# Altium PCB PCB1.PcbDoc
Units mil, origin at the board's own origin, x right, y up, seen from the top; angles counter-clockwise.
Board outline 1140 x 500 mil, 2 copper layers (Top Layer, Bottom Layer); 14 components, 8 nets, 37 pads, 4 vias.
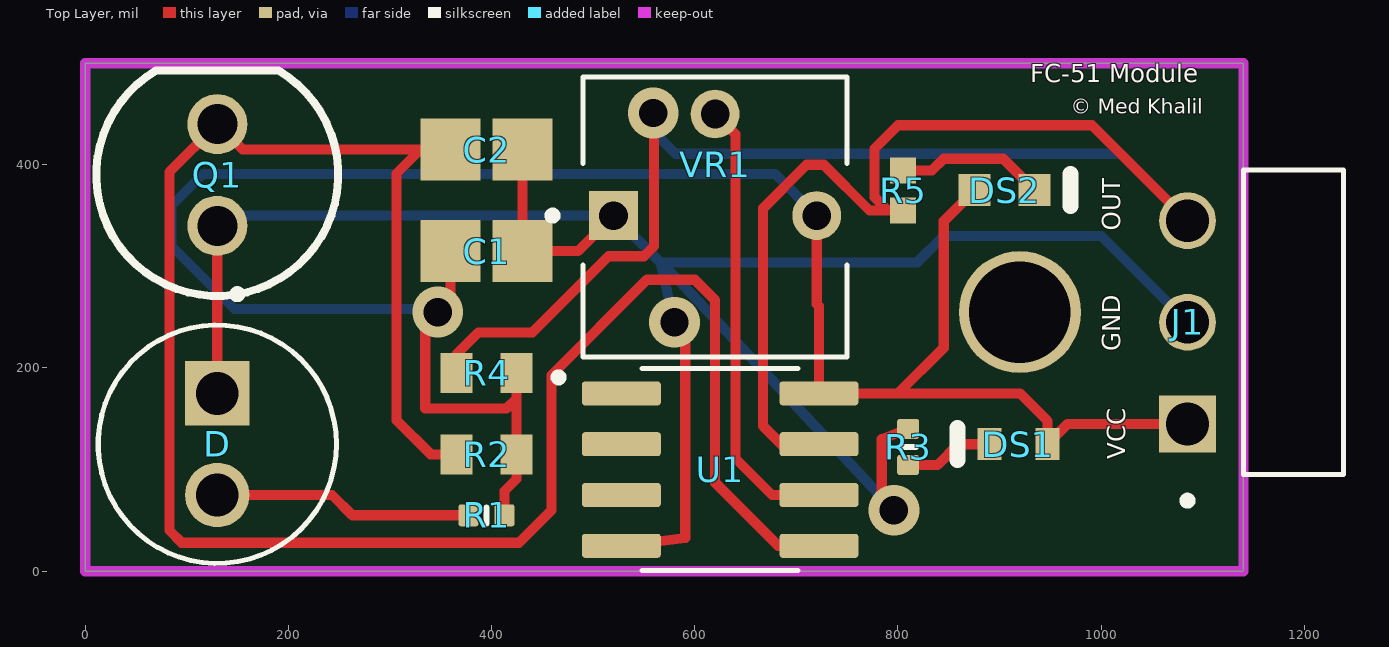
[diagram p0: Top Layer view]
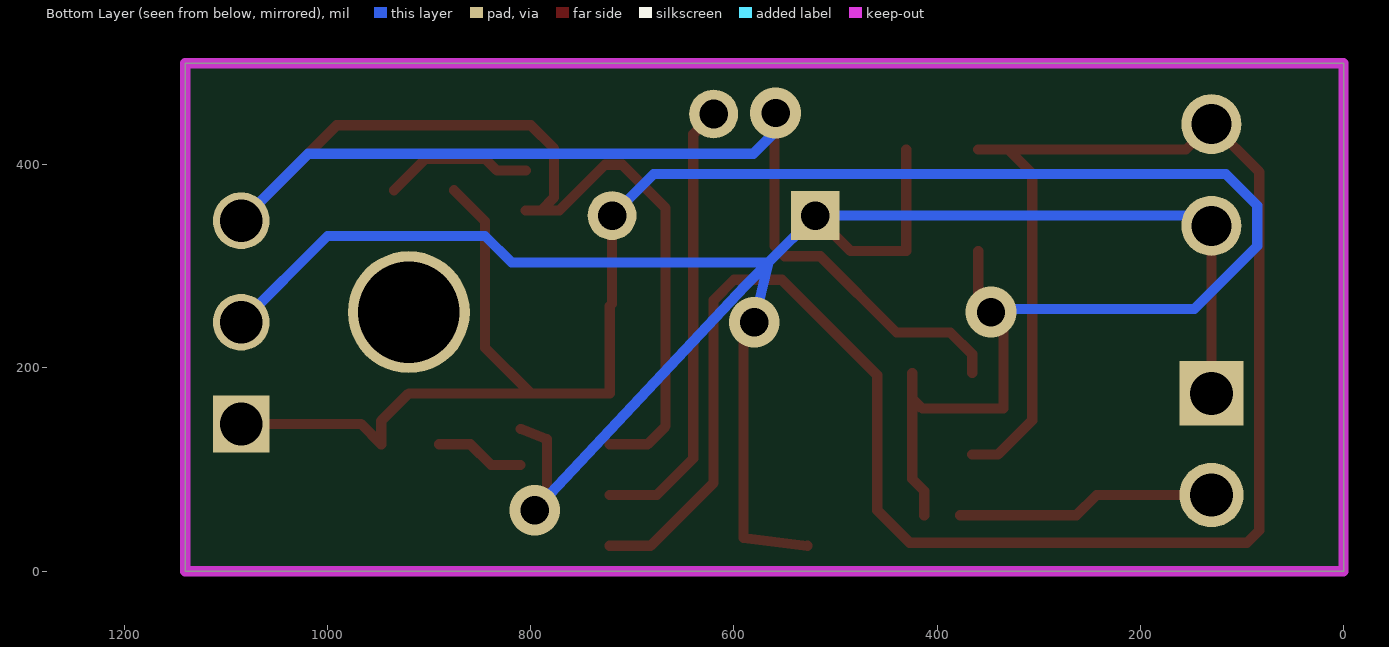
[diagram p1: Bottom Layer view, seen from below]
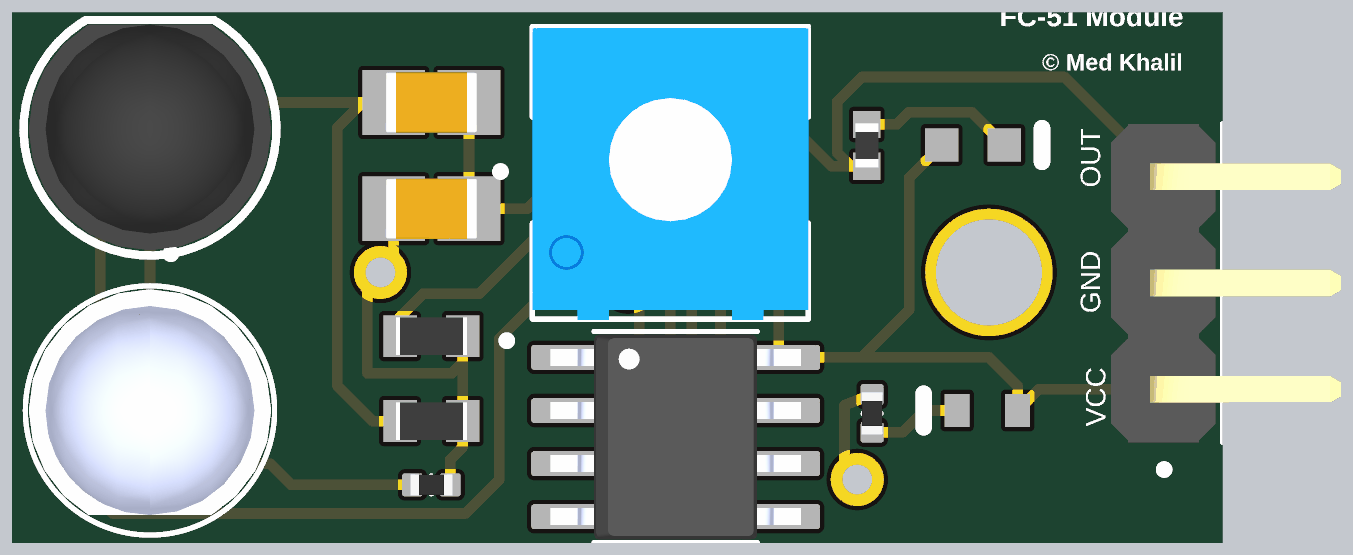
[diagram p2: 3D render of the assembled board from above, using the file's embedded part models]

## Layer stack, top to bottom
Top Solder: solder mask 0.4, Solder Resist, Dk 3.5
Top Layer: signal copper 1.4
Dielectric 1: dielectric 12.6, FR-4, Dk 4.8
Bottom Layer: signal copper 1.4
Bottom Solder: solder mask 0.4, Solder Resist, Dk 3.5

## Board outline
0,0 0,500 1140,500 1140,0

## Design rules (kind name [scope] priority, off if disabled: settings)
Clearance [All] p1: gap=10 ignorepadtopadclearanceinfootprint=FALSE
PolygonConnect [All] p1: connectstyle=Relief reliefconductorwidth=10 reliefentries=4 polygonreliefangle="90 Angle" airgapwidth=10
RoutingVias [All] p1: holewidth=28 width=50 viastyle="Through Hole" minholewidth=28 minwidth=50 maxholewidth=28 maxwidth=50
SolderMaskExpansion [All] p1: expansion=4 istentingtop=FALSE
SupplyNets "Schematic Supply Nets_1" [InNet('VCC')] p1: voltage=0.000
SupplyNets "Schematic Supply Nets" [InNet('GND')] p2: voltage=0.000
Width [All] p1: maxlimit=10 minlimit=10 preferedwidth=10
30 further rules are at their usual default settings.

## Components (designator, comment, footprint, x,y, rotation, side; value= is the part's Value field where it differs from the comment)
C1 "Capacitor 1 uF +/- 10% 25 V 0805" CAPC2013X145X50ML20T25 395,315 r0 top value=1µF
C2 "Capacitor 1 uF +/- 10% 25 V 0805" CAPC2013X145X50ML20T25 395,415 r0 top value=1µF
D "TSHG6200" LEDRD254W55D595H900 130,125 r270 top
DS1 "TLMS1100-GS08" VISH-TLMX1100_V 918.54,125 r180 top
DS2 "LTST-C190GKT" LTST-C190GKT_V 905,375 r0 top
J1 "THS-03-R-RAF" VALCON_THS-03-R-RAF 1085,245 r270 top
Q1 "1540051NC2590" WL-TTRB_D5H8.7 130,390 r270 top
R1 "Resistor 100R +/-1 % 0402 63 mW" RESC0402(1005)_L 395,55 r0 top value=100
R2 "Resistor 10k +/-1% 0603 100 mW" RESC1608X55X25ML10T15 395,115 r0 top value=10k
R3 "Resistor 1K +/-5 % 0402 63 mW" RESC0402(1005)_L 810,122.28 r90 top value=1k
R4 "Resistor 10k +/-1% 0603 100 mW" RESC1608X55X25ML10T15 395,195 r0 top value=10k
R5 "Resistor 1k +/-1% 0402 100 mW" RESC1005X40X25ML05T05 805,374.68 r90 top value=1k
U1 "LM393D" SOIC127P599X175-8N 625,100 r0 top
VR1 "3362P-1-103LF" TRIM_3362P-1-103LF 620,350 r0 top

## Footprints (in the part's own frame and the unit in brackets; to place one, negate y for a bottom-side part, rotate by r counter-clockwise, add the part's x,y. Pads: shape width x height; smd on the part's side, far side on the other; paste and mask are expansions set on the pad)
CAPC2013X145X50ML20T25 [mm] "Chip Capacitor, 2-Leads, Body 2.2x1.45mm, IPC Low Density"
  rect 1.5x1.55 smd: 1(-0.9,0) 2(0.9,0)
  body extent -1.1,-0.72 1.1,0.73, height 1.45
LEDRD254W55D595H900 [mm]
  round 1.61 hole 1.07: A(1.27,0)
  rect 1.61x1.61 hole 1.07: C(-1.27,0)
  silkscreen extent -3.85,-2.98 2.98,2.98, body extent -2.88,-2.9 2.5,2.9, height 9.01
LTST-C190GKT_V [mm] "SMD, 2-Leads, Body 1.6x0.8mm"
  rect 0.8x0.8 smd: 1(-0.75,0) 2(0.75,0)
  silkscreen extent 1.65,-0.4 1.65,0.4, body extent -0.8,-0.4 0.8,0.4, height 0.9
RESC0402(1005)_L [mm] "Chip Resistor, Body 1.0x0.5mm, IPC High Density"
  rrect25% 0.5x0.55 smd: 1(-0.45,0) 2(0.45,0)
  silkscreen extent 0,-0.2 0,0.2, body extent -0.5,-0.25 0.5,0.25, height 0.3
RESC1005X40X25ML05T05 [mm] "Chip Resistor, 2-Leads, Body 1.05x0.55mm, IPC Low Density"
  rect 0.65x0.65 smd: 1(-0.5,0) 2(0.5,0)
  body extent -0.53,-0.28 0.53,0.28, height 0.4
RESC1608X55X25ML10T15 [mm] "Chip Resistor, 2-Leads, Body 1.70x0.90mm, IPC Low Density"
  rect 0.8x1 smd: 1(-0.75,0) 2(0.75,0)
  body extent -0.85,-0.45 0.85,0.45, height 0.55
SOIC127P599X175-8N [mm]
  rrect25% 1.97x0.6 smd: 1(-2.47,1.905) 2(-2.47,0.635) 3(-2.47,-0.635) 4(-2.47,-1.905) 5(2.47,-1.905) 6(2.47,-0.635) 7(2.47,0.635) 8(2.47,1.905)
  silkscreen extent -4.14,-2.53 1.95,2.53, body extent -3,-2.45 3,2.45, height 1.75
TRIM_3362P-1-103LF [mil]
  rect 48.11x48.11 hole 28.11: 1(-100,0)
  round 48.11 hole 28.11: 2(0,100) 3(100,0)
  silkscreen extent -164,-139 130,137, body extent -130,-140 130,135, height 170
VALCON_THS-03-R-RAF [mm]
  rect 1.42x1.42 hole 1.07: 01(2.54,0)
  round 1.42 hole 1.07: 02(0,0) 03(-2.54,0)
  silkscreen extent -3.81,-0.1 4.56,3.9, body extent -3.81,-1.27 3.81,4.23, height 4.23
VISH-TLMX1100_V [mm] "SMD, 2-Leads, Body 1.6x0.8mm"
  rect 0.6x0.8 smd: 1(-0.725,0) 2(0.725,0)
  silkscreen extent 1.52,-0.4 1.52,0.4, body extent -0.8,-0.4 0.8,0.4, height 0.65
WL-TTRB_D5H8.7 [mm] "THT Phototransistor Round Black, body diameter 5mm"
  round 1.5 hole 1: 1(-1.27,0) 2(1.27,0)
  silkscreen extent -2.61,-3.02 3.02,3.02, body extent -2.5,-2.9 2.9,2.9, height 9.2

## Part data
C1 C2: library part CMP-001-00010-6, "Chip Capacitor, 1 uF, +/-10%, 25 V, 0805 (2012 Metric)", Capacitor Type=Ceramic, Case/Package=0805, Max Operating Temperature=125°C, Min Operating Temperature=-55°C, Tolerance=10%, Voltage Rating=25V, Mounting Technology=SM, Pins=2, RoHS Compliant=True
D: "Infrared Emitter 850nm 1800mW/sr Circular Top Mount 2-Pin T-1 3/4", Package="Radial Vishay", Availability=Good, BuyPart=https://www.snapeda.com/parts/TSHG6200/Vishay/view-part/3623411/?ref=eda, DigiKey-Purchase-URL=https://snapeda.com/shop?store=DigiKey&id=3623411, MF=Vishay, Mouser-Purchase-URL=https://snapeda.com/shop?store=Mouser&id=3623411, MP=TSHG6200, Price=None, SnapEDA_Link=https://www.snapeda.com/parts/TSHG6200/Vishay/view-part/3623411/?ref=snap
DS1: library part CMP-007-00030-2, "Red Led, 20mA, 2.1 V, -40 to 100 degC, 2-Pin SMD (0603), RoHS, Tape and Reel", Case/Package=0603, Colour=Red, Forward Current=20mA, Forward Voltage=2.1V, Manufacturer="Vishay Semiconductor", Max Operating Temperature=100°C, Min Operating Temperature=-40°C, Package Description="2-Pin Surface Mount Device, Body 1.6 x 0.8 mm", Package Quantity=3000, Package Reference=TLMX1100, Power=90mW, Datasheet URL=http://www.vishay.com/docs/83173/tlmb1100.pdf, Datasheet Version="Rev. 2.7, 03/2016", Illumination Colour=Red, Lens Style=Clear, Luminous Intensity=63mcd, Manufacturer URL=http://www.vishay.com/, Mounting Technology=SM, Nominal Vf=2.1V, Packaging=TapeandReel, Pins=2, RoHS Compliant=True, Viewing Angle=160degrees
DS2: library part CMP-007-00022-2, "LED Uni-Color Green, 100 mW, 30 mA, -55 to 85 degC, 2-Pin SMD, RoHS, Tape and Reel", Case/Package=0603, Colour=Green, Forward Current=20mA, Forward Voltage=2.1V, Manufacturer=Lite-On, Max Operating Temperature=85°C, Min Operating Temperature=-55°C, Package Description="2-Pin Surface Mount Device, Body 1.6 x 0.8 mm", Package Quantity=3000, Package Reference=C190GKT, Power=100mW, Datasheet URL=http://datasheet.octopart.com/LTST-C190GKT-Lite-On-datasheet-158530.pdf, Datasheet Version=Dec-06, Illumination Colour=Green, Lens Style=Clear, Luminous Intensity=6mcd, Manufacturer URL=http://www.us.liteon.com/, Mounting Technology=SM, Nominal Vf=2.1V, Packaging=TapeandReel, Pins=2, RoHS Compliant=True, Viewing Angle=130degrees
J1: Package=None, Availability=Unavailable, MP=THS-03-R-RAF, Price=None
Q1: "WL-TTRB THT Phototransistor Round Black, D5H8.7mm, 700-1100nm, 1.5mA, 25°", Collector Current=1.5mA, Collector Current Min=10mA, Collector-Emitter Dark Current=100nA, Manufacturer="Wurth Elektronik", Operating Temperature Max=85°C, Operating Temperature Min=-40°C, Category=Phototransistors, Chip Technology=Si, ComponentLink1Description="Website Link", ComponentLink1URL=https://www.we-online.com/redexpert/article/1540051NC2590?ad, ComponentLink2Description="Datasheet Link", ComponentLink2URL=https://www.we-online.com/redexpert/spec/1540051NC2590?ad, Diameter=5mm, Height=8.7mm, Manufacturer Part Number=1540051NC2590, Match Code=WL-TTRB, Mount="Through Hole", Packaging=Bulk, Polarity="NPN Phototransistor", Range of Spectral Bandwidth Max=1100nm, Range of Spectral Bandwidth Min=700nm, Viewing Angle=25°, Wavelength of Peak Sensitivity=940nm
R1: library part CMP-009-00167-3, "Chip Resistor, 100 Ohms, +/-1 %, 63 mW, -55 to 155 degC, 0402", Case/Package=0402, Max Operating Temperature=155°C, Min Operating Temperature=-55°C, Power=63mW, Tolerance=1%, Pins=2
R2 R4: library part CMP-009-00017-5, "Chip Resistor, 10 KOhm, +/- 1%, 01 W, -55 to 155 degC, 0603 (1608 Metric)", Case/Package=0603, Max Operating Temperature=155°C, Min Operating Temperature=-55°C, Power=100mW, Tolerance=1%, Voltage Rating=50V, Mounting Technology=SM, Pins=2, RoHS Compliant=True
R3: library part CMP-009-00157-3, "Chip Resistor, 1 kOhms, +/-5 %, 63 mW, -55 to 155 degC, 0402", Case/Package=0402, Max Operating Temperature=155°C, Min Operating Temperature=-55°C, Power=63mW, Tolerance=5%, Pins=2
R5: library part CMP-009-00009-5, "Chip Resistor, 1 KOhm, +/- 1%, 0.1 W, -55 to 155 degC, 0402 (1005 Metric)", Case/Package=0402, Max Operating Temperature=155°C, Min Operating Temperature=-55°C, Power=100mW, Tolerance=1%, Voltage Rating=50V, Mounting Technology=SM, Pins=2, RoHS Compliant=True
U1: "Dual differential comparator, commercial grade", Package="SOIC-8 Texas Instruments", Availability="In Stock", Check_prices=https://www.snapeda.com/parts/LM393D/Texas+Instruments/view-part/?ref=eda, MF="Texas Instruments", MP=LM393D, Price=None, Purchase-URL=https://pricing.snapeda.com/search/part/LM393D/?ref=eda, SnapEDA_Link=https://www.snapeda.com/parts/LM393D/Texas+Instruments/view-part/?ref=snap
VR1: "10 kOhms 0.5W, 1/2W PC Pins Through Hole Trimmer Potentiometer Cermet 1 Turn Top Adjustment", Package="3116 Bourns", Check_prices=https://www.snapeda.com/parts/3362P-1-103LF/Bourns/view-part/13764/?ref=eda, Digi-Key_Part_Number=3362P-103LF-ND, MF=Bourns, MP=3362P-1-103LF, Purchase-URL=https://pricing.snapeda.com/search/part/3362P-1-103LF/?ref=eda, SnapEDA_Link=https://www.snapeda.com/parts/3362P-1-103LF/Bourns/view-part/13764/?ref=snap

## Free pads (board coordinates)
  round 120 hole 100: 9(920,255)

## Via types
v1: diameter 50, hole 28, Top Layer to Bottom Layer, 4 vias

## Nets (pads, with @x,y where several pads share a name; then routed paths per layer and width w, separated by ;. In a path a pad name is that pad's centre, name@x,y a point inside that pad or via, vN(x,y) a via of type N, cw(c..) or ccw(c..) an arc to the next point about the centre after c; other vN are vias at no path point)
GND: C1.2 C2.2 D.C J1.02 Q1.2 R3.2 U1.4 VR1.1 | length 2177.8
  Top Layer w10: D.C Q1.2 ; C2.2 C1.2 485,315 VR1.1 ; U1.4 590.62,32.62 590.62,234.38 v1(580,245) ; v1(796,60) 784,72.81 784,130 R3.2
  Bottom Layer w10: Q1.2 130,350 VR1.1 566,304 ; v1(580,245) 566,304 ; v1(796,60) 589,281 566,304 ; J1.02 1000,330 845,330 819,304 566,304
NetD_A: D.A R1.1 | length 255.6
  Top Layer w10: D.A 243,75 263,55 R1.1
NetDS1_2: DS1.2 R3.1 | length 88.5
  Top Layer w10: R3.1 839,104.57 859.43,125 DS1.2
NetDS2_2: DS2.2 R5.2 | length 147.2
  Top Layer w10: R5.2 833.37,394.37 845,406 903.53,406 DS2.2
OUTPUT: J1.03 R4.1 R5.1 U1.7 | length 1850.2
  Top Layer w10: R4.1 365.47,213.47 387,235 440,235 515,310 550,310 560,320 560,450 v1(559.03,450.97) ; U1.7 685,125 667.23,142.77 667.23,357.23 710,400 727,400 772,355 790,355 ; R5.1 790,355 ; J1.03 991,439 800,439 777,416 777,368 790,355
  Bottom Layer w10: v1(559.03,450.97) 550,441.94 581,410.94 1019.06,410.94 J1.03
PIN5: C2.1 Q1.1 R2.1 U1.5 | length 2051.6
  Top Layer w10: C2.1 330,415 ; R2.1 340,115 306.47,148.53 306.47,391.47 330,415 ; U1.5 681.99,25 620,86.99 620,266.82 600,286.82 552.82,286.82 459,193 459,60 427,28 95,28 83,40 83,393 Q1.1 155,415 330,415
PIN6: U1.6 VR1.2 | length 444.4
  Top Layer w10: VR1.2 640,430 640,111 676,75 U1.6
VCC: C1.1 DS1.1 DS2.1 J1.01 R1.2 R2.2 R4.2 U1.8 VR1.3 | length 2226
  Top Layer w10: v1(347,255) v1@359.57,264.57 ; C1.1 v1@359.57,264.57 ; R1.2 412.72,79 424.53,90.81 R2.2 424.53,170 ; R4.2 424.53,170 ; VR1.3 720,263.24 722.24,261 U1.8 800,175 ; DS2.1 845,344.53 845,220 800,175 ; J1.01 967.09,145 DS1.1 947.09,147.91 920,175 800,175 ; v1@359.57,264.57 334.72,239.72 334.72,160 414.53,160 424.53,170
  Bottom Layer w10: v1(347,255) 344,258 147,258 85,320 85,360 115.94,390.94 679.06,390.94 VR1.3
pads on no net: U1.1 U1.2 U1.3

## Keep-outs
Keep-Out Layer:
  the board outline again, w10

## Silkscreen, mask and mechanical layers (free items; w line width, h text height)
Top Overlay:
  text "FC-51 Module" at 930,475.47 h30
  text "© Med Khalil" at 970,445.39 h25
  text "OUT" at 1024.67,335 h30 r90
  text "GND" at 1024.67,216.66 h30 r90
  text "VCC" at 1029.67,110.03 h30 r90